# Altium PCB SmartAGR_Arduino_Version.PcbDoc
Units mil, origin at the board's own origin, x right, y up, seen from the top; angles counter-clockwise.
Board outline 6692.91 x 3937.01 mil, 2 copper layers (Top Layer, Bottom Layer); 149 components, 170 nets, 535 pads, 370 vias.
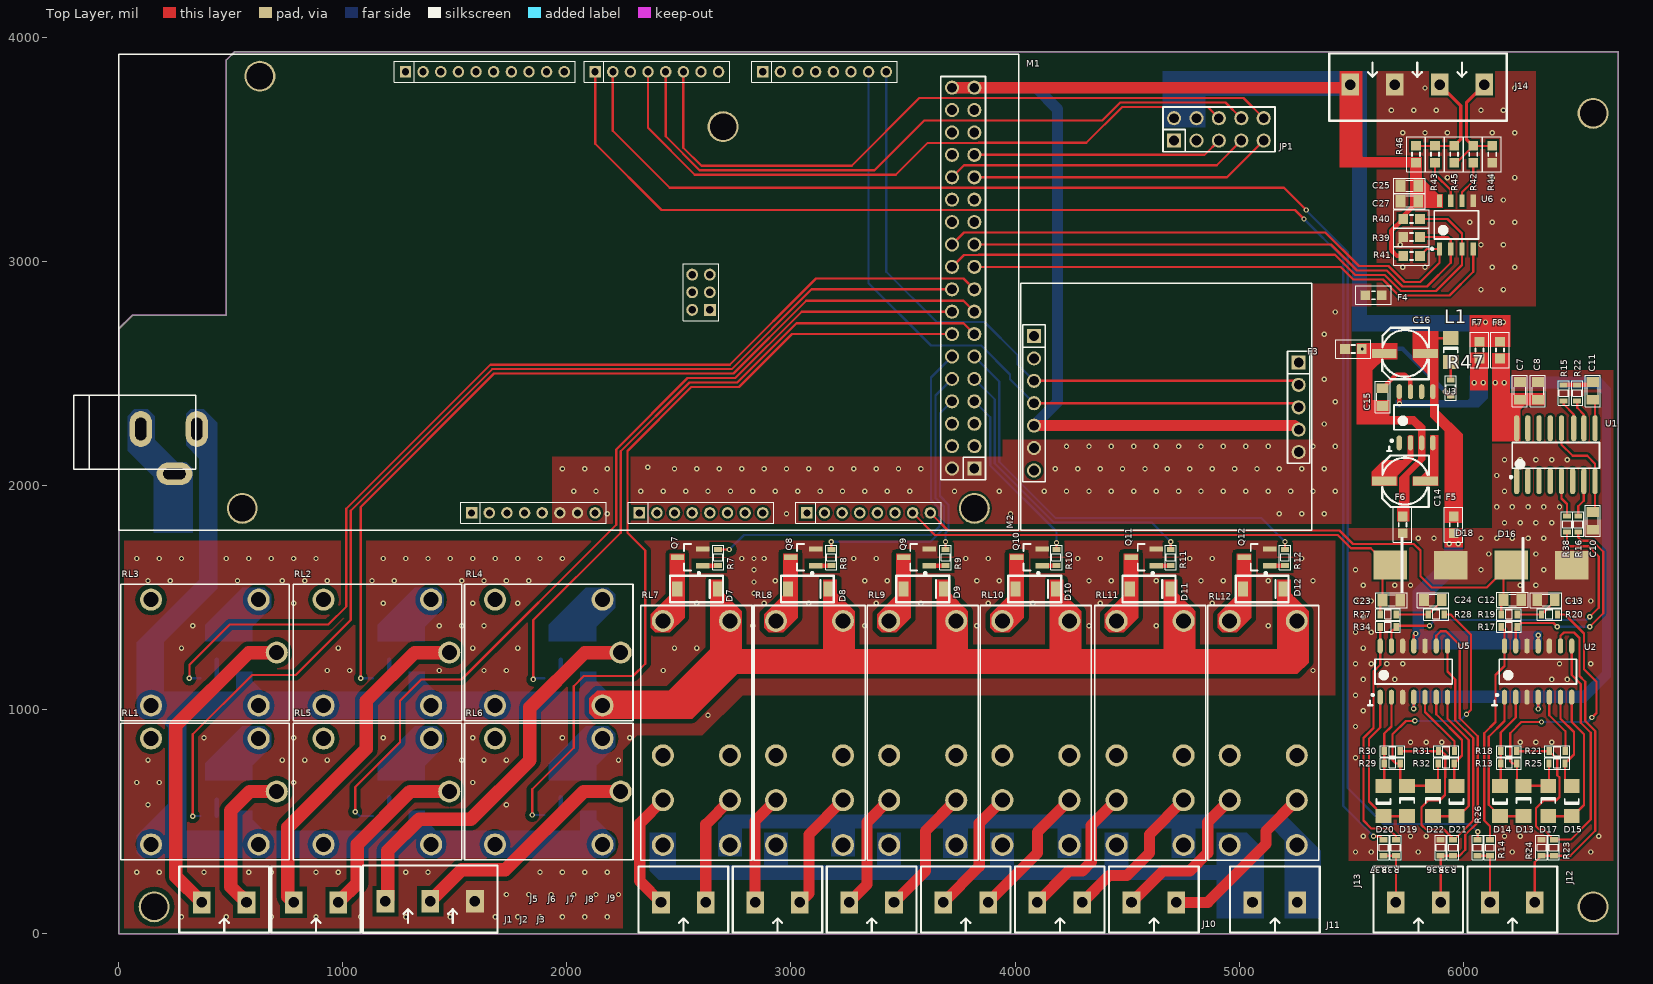
[diagram p0: Top Layer view]
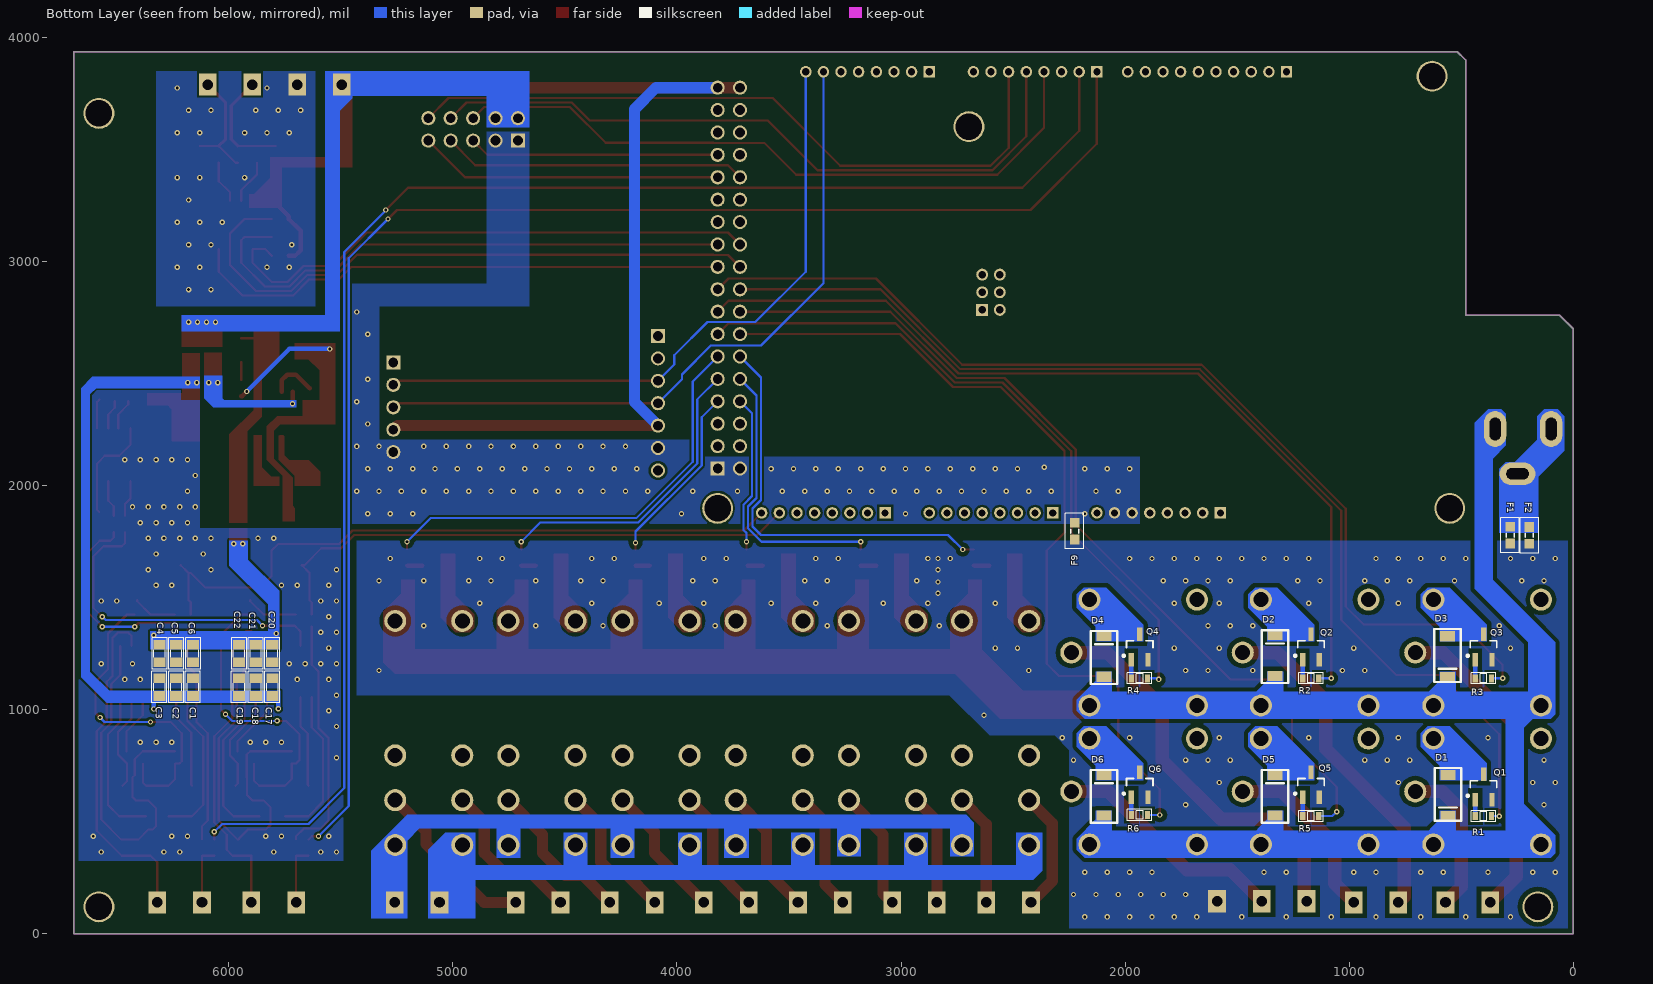
[diagram p1: Bottom Layer view, seen from below]

## Layer stack, top to bottom
Top Solder: solder mask 0.4, Solder Resist, Dk 3.5
Top Layer: signal copper 1.4
Dielectric 1: dielectric 12.6, FR-4, Dk 4.8
Bottom Layer: signal copper 1.4
Bottom Solder: solder mask 0.4, Solder Resist, Dk 3.5

## Board outline
0,0 0,2700 60,2760 480,2760 480,3900 517.01,3937.01 6692.91,3937.01 6692.91,0

## Design rules (kind name [scope] priority, off if disabled: settings)
Clearance Clearance_3 [InNamedPolygon('RGND')] p1: gap=20
Clearance Clearance_2 [InNamedPolygon('RGND')] p2: gap=20
Clearance Clearance_1 [InNamedPolygon('RGND')] p3: gap=30
Clearance [All] p4: gap=10
DiffPairsRouting [All] p1: maxlimit=10 minlimit=10 mostfreqgap=10 toplayer_minwidth=15 toplayer_maxwidth=15 toplayer_prefwidth=15 bottomlayer_minwidth=15 bottomlayer_maxwidth=15 bottomlayer_prefwidth=15 maxuncoupledlength=500
PolygonConnect PolygonConnect_12 [All vs IsNamedPolygon('AGND_TOP')] p1: connectstyle=Direct reliefconductorwidth=10 reliefentries=4 polygonreliefangle="90 Angle" airgapwidth=10
PolygonConnect PolygonConnect_11 [All vs IsNamedPolygon('AGND_BOT')] p2: connectstyle=Direct reliefconductorwidth=10 reliefentries=4 polygonreliefangle="90 Angle" airgapwidth=10
PolygonConnect PolygonConnect_10 [All vs IsNamedPolygon('DGND_BOT')] p3: connectstyle=Direct reliefconductorwidth=10 reliefentries=4 polygonreliefangle="90 Angle" airgapwidth=10
PolygonConnect PolygonConnect_9 [All vs IsNamedPolygon('DGND_TOP')] p4: connectstyle=Direct reliefconductorwidth=10 reliefentries=4 polygonreliefangle="90 Angle" airgapwidth=10
PolygonConnect PolygonConnect_8 [All vs IsNamedPolygon('DGND_BOT')] p5: connectstyle=Direct reliefconductorwidth=10 reliefentries=4 polygonreliefangle="90 Angle" airgapwidth=10
PolygonConnect PolygonConnect_7 [All vs IsNamedPolygon('RS485_GND_BOT')] p6: connectstyle=Direct reliefconductorwidth=10 reliefentries=4 polygonreliefangle="90 Angle" airgapwidth=10
PolygonConnect PolygonConnect_6 [All vs IsNamedPolygon('RS485_GND_TOP')] p7: connectstyle=Direct reliefconductorwidth=10 reliefentries=4 polygonreliefangle="90 Angle" airgapwidth=10
PolygonConnect PolygonConnect_5 [All vs IsNamedPolygon('RS485_GND_BOT')] p8: connectstyle=Direct reliefconductorwidth=10 reliefentries=4 polygonreliefangle="90 Angle" airgapwidth=10
PolygonConnect PolygonConnect_4 [All vs IsNamedPolygon('AGND_BOT')] p9: connectstyle=Direct reliefconductorwidth=10 reliefentries=4 polygonreliefangle="90 Angle" airgapwidth=10
PolygonConnect PolygonConnect_3 [All vs IsNamedPolygon('AGND_BOT')] p10: connectstyle=Direct reliefconductorwidth=10 reliefentries=4 polygonreliefangle="90 Angle" airgapwidth=10
PolygonConnect PolygonConnect_2 [All vs IsNamedPolygon('AGND_BOT')] p11: connectstyle=Direct reliefconductorwidth=10 reliefentries=4 polygonreliefangle="90 Angle" airgapwidth=10
PolygonConnect PolygonConnect_1 [All vs IsNamedPolygon('RGND')] p12: connectstyle=Direct reliefconductorwidth=10 reliefentries=4 polygonreliefangle="90 Angle" airgapwidth=10
PolygonConnect [All] p13: connectstyle=Relief reliefconductorwidth=10 reliefentries=4 polygonreliefangle="90 Angle" airgapwidth=10
RoutingVias [All] p1: holewidth=12 width=24 viastyle="Through Hole" minholewidth=10 minwidth=4 maxholewidth=50 maxwidth=100
SolderMaskExpansion [All] p1: expansion=4
Width [All] p1: maxlimit=100 minlimit=10 preferedwidth=10
29 further rules are at their usual default settings.

## Classes and differential pairs
component class RS485: C25 C27 J14 R39 R40 R41 R42 R43 R44 R45 R46 U6
component class Arduino_Mega2560: F1 F2 F3 F4 F9 JP1 M1 M2
component class Relay12VDC: D1 D2 D3 D4 D5 D6 J1 J2 J3 Q1 Q2 Q3 Q4 Q5 Q6 R1 R2 R3 R4 R5 R6 RL1 RL2 RL3 RL4 RL5 RL6
component class Relay220VAC: D7 D8 D9 D10 D11 D12 J5 J6 J7 J8 J9 J10 J11 Q7 Q8 Q9 Q10 Q11 Q12 R7 R8 R9 R10 R11 R12 RL7 RL8 RL9 RL10 RL11 RL12
component class "TDS sensor 1": C1 C2 C3 C4 C5 C6 C7 C8 C10 C11 C12 C13 C14 C15 C16 C17 C18 C19 C20 C21 C22 C23 C24 D13 D14 D15 D16 D17 D18 D19 D20 D21 D22 F5 F6 F7 F8 J12 J13 L1 R13 R14 R15 R16 R17 R18 R19 R20 R21 R22 R23 R24 R25 R26 R27 R28 R29 R30 R31 R32 R33 R34 R35 R36 R37 R38 R47 U1 U2 U3 U5
differential pair DATA: +DATA_P -DATA_N

## Components (designator, comment, footprint, x,y, rotation, side; value= is the part's Value field where it differs from the comment)
C1 "100n Cer" CN-SMD-0805 6160.01,1100.64 r270 bottom
C2 "1n Cer" CN-SMD-0805 6235.01,1100.64 r270 bottom
C3 "10n Cer" CN-SMD-0805 6310.01,1100.64 r270 bottom
C4 "100n Cer" CN-SMD-0805 6310.01,1250.64 r90 bottom
C5 "1n Cer" CN-SMD-0805 6235.01,1250.64 r90 bottom
C6 "10n Cer" CN-SMD-0805 6160.01,1250.64 r90 bottom
C7 "10n Cer" CN-SMD-0805 6254,2423 r270 top
C8 "100n Cer" CN-SMD-0805 6334,2423 r270 top
C10 "100n Cer" CN-SMD-0805 6579,1843 r90 top
C11 "1n Cer" CN-SMD-0805 6579,2423 r90 top
C12 "10u Cer" CN-SMD-0805 6220,1490 r180 top
C13 "10u Cer" CN-SMD-0805 6370,1490 r0 top
C14 "CAP ALUM 100UF 25V 20% SMDL" CAPALU_SM_5.3x5.3 5740,2020 r180 top
C15 "100n Cer" CN-SMD-0805 5640,2395 r90 top
C16 "CAP ALUM 100UF 25V 20% SMDL" CAPALU_SM_5.3x5.3 5740,2590 r180 top
C17 "100n Cer" CN-SMD-0805 5805,1100.64 r270 bottom
C18 "1n Cer" CN-SMD-0805 5880,1100.64 r270 bottom
C19 "10n Cer" CN-SMD-0805 5955,1100.64 r270 bottom
C20 "100n Cer" CN-SMD-0805 5806,1250.64 r90 bottom
C21 "1n Cer" CN-SMD-0805 5880,1250.64 r90 bottom
C22 "10n Cer" CN-SMD-0805 5955,1250.64 r90 bottom
C23 "10u Cer" CN-SMD-0805 5680,1489 r180 top
C24 "10u Cer" CN-SMD-0805 5865,1490 r0 top
C25 "100n Cer" CN-SMD-0805 5760,3339 r0 top
C27 "10n Cer" CN-SMD-0805 5760,3269 r0 top
D1 "M7 SMD" "Diode 1N4007 SMD" 618.11,740 r270 bottom
D2 "M7 SMD" "Diode 1N4007 SMD" 1271.89,1118.78 r90 bottom
D3 "M7 SMD" "Diode 1N4007 SMD" 620,1360 r270 bottom
D4 "M7 SMD" "Diode 1N4007 SMD" 2035,1115 r90 bottom
D5 "M7 SMD" "Diode 1N4007 SMD" 1271.89,495 r90 bottom
D6 "M7 SMD" "Diode 1N4007 SMD" 2035,495 r90 bottom
D7 "M7 SMD" "Diode 1N4007 SMD" 2460,1480 r0 top
D8 "M7 SMD" "Diode 1N4007 SMD" 2955,1480 r0 top
D9 "M7 SMD" "Diode 1N4007 SMD" 3470,1480 r0 top
D10 "M7 SMD" "Diode 1N4007 SMD" 3970,1480 r0 top
D11 "M7 SMD" "Diode 1N4007 SMD" 4480,1480 r0 top
D12 "M7 SMD" "Diode 1N4007 SMD" 4985,1480 r0 top
D13 "Diode 4148" CD3216-1206 6270,595 r90 top
D14 "Diode 4148" CD3216-1206 6165,590 r270 top
D15 "Diode 4148" CD3216-1206 6485,590 r270 top
D16 "Diode_SS34" DO-214AB_MOD_EXT 6350,1645 r0 top
D17 "Diode 4148" CD3216-1206 6380,595 r90 top
D18 "Diode_SS34" DO-214AB_MOD_EXT 5810,1645 r0 top
D19 "Diode 4148" CD3216-1206 5750,595 r90 top
D20 "Diode 4148" CD3216-1206 5645,590 r270 top
D21 "Diode 4148" CD3216-1206 5970,590 r270 top
D22 "Diode 4148" CD3216-1206 5865,595 r90 top
F1 "FBFB0805" RESC_0603 281,1779 r270 bottom
F2 "FBFB0805" RESC_0603 196,1778 r270 bottom
F3 "FBFB0805" RESC_0603 5510,2610 r0 top
F4 "FBFB0805" RESC_0603 5600,2850 r0 top
F5 "FBFB0805" RESC_0603 5958,1825 r270 top
F6 "FBFB0805" RESC_0603 5730,1825 r90 top
F7 "FBFB0805" RESC_0603 6073,2605 r270 top
F8 "FBFB0805" RESC_0603 6165,2605 r270 top
F9 "FBFB0805" RESC_0603 2225,1797 r270 bottom
J1 "MediumHeader_2" "Medium - Header 2" 470,140 r180 top
J2 "MediumHeader_2" "Medium - Header 2" 880,140 r180 top
J3 "MediumHeader_3" "Medium - Header 3" 1190,145 r0 top
J5 "MediumHeader_2" "Medium - Header 2" 2520,140 r180 top
J6 "MediumHeader_2" "Medium - Header 2" 2940,140 r180 top
J7 "MediumHeader_2" "Medium - Header 2" 3360,140 r180 top
J8 "MediumHeader_2" "Medium - Header 2" 3780,140 r180 top
J9 "MediumHeader_2" "Medium - Header 2" 4200,140 r180 top
J10 "MediumHeader_2" "Medium - Header 2" 4620,140 r180 top
J11 "MediumHeader_2" "Medium - Header 2" 5160,140 r180 top
J12 "MediumHeader_2" "Medium - Header 2" 6220,140 r180 top
J13 "MediumHeader_2" "Medium - Header 2" 5800,140 r180 top
J14 "MediumHeader_4" "Medium - Header 4" 6095,3790 r180 top
JP1 "JP5x2" JP5-D2T 4910,3590 r0 top
L1 "LTST-C171KRKT" LED_0805 5945,2605 r90 top
M1 "MEGA 2560 Board" "MEGA 2560" 0,1800 r0 top
M2 "RTC MODULE" "MODULE RTC DS1307-AT24C" 5325,2904 r180 top
Q1 "MMBT3904" SOT23_L_MOD 400,655 r90 bottom
Q2 "MMBT3904" SOT23_L_MOD 1170,1280 r90 bottom
Q3 "MMBT3904" SOT23_L_MOD 400,1280 r90 bottom
Q4 "MMBT3904" SOT23_L_MOD 1935,1280 r90 bottom
Q5 "MMBT3904" SOT23_L_MOD 1170,665 r90 bottom
Q6 "MMBT3904" SOT23_L_MOD 1935,665 r90 bottom
Q7 "MMBT3904" SOT23_L_MOD 2550,1680 r180 top
Q8 "MMBT3904" SOT23_L_MOD 3055,1680 r180 top
Q9 "MMBT3904" SOT23_L_MOD 3560,1680 r180 top
Q10 "MMBT3904" SOT23_L_MOD 4065,1680 r180 top
Q11 "MMBT3904" SOT23_L_MOD 4575,1680 r180 top
Q12 "MMBT3904" SOT23_L_MOD 5080,1680 r180 top
R1 "R_1K_0603" RES-SMD-0603 400,525 r0 bottom
R2 "R_1K_0603" RES-SMD-0603 1170,1140 r0 bottom
R3 "R_1K_0603" RES-SMD-0603 400,1140 r0 bottom
R4 "R_1K_0603" RES-SMD-0603 1935,1140 r0 bottom
R5 "R_1K_0603" RES-SMD-0603 1170,525 r0 bottom
R6 "R_1K_0603" RES-SMD-0603 1935,530 r0 bottom
R7 "R_1K_0603" RES-SMD-0603 2675,1680 r270 top
R8 "R_1K_0603" RES-SMD-0603 3180,1680 r270 top
R9 "R_1K_0603" RES-SMD-0603 3690,1680 r270 top
R10 "R_1K_0603" RES-SMD-0603 4185,1680 r270 top
R11 "R_1K_0603" RES-SMD-0603 4695,1680 r270 top
R12 "R_1K_0603" RES-SMD-0603 5205,1680 r270 top
R13 "R_10K_0603" RES-SMD-0603 6205,760 r180 top
R14 "R_0R_0603" RES-SMD-0603 6120,385 r270 top
R15 "R_100K_0603" RES-SMD-0603 6449,2413 r90 top
R16 "R_100K_0603" RES-SMD-0603 6514,1828 r90 top
R17 "R_4K99_0603" RES-SMD-0603 6205,1370 r0 top
R18 "R_10K_0603" RES-SMD-0603 6205,815 r180 top
R19 "R_10K_0603" RES-SMD-0603 6205,1425 r0 top
R20 "R_10K_0603" RES-SMD-0603 6385,1425 r0 top
R21 "R_10K_0603" RES-SMD-0603 6420,815 r0 top
R22 "R_10K_0603" RES-SMD-0603 6509,2413 r90 top
R23 "R_4K99_0603" RES-SMD-0603 6405,385 r270 top
R24 "R_1M_0603" RES-SMD-0603 6350,385 r270 top
R25 "R_10K_0603" RES-SMD-0603 6420,760 r180 top
R26 "R_0R_0603" RES-SMD-0603 6065,385 r270 top
R27 "R_10K_0603" RES-SMD-0603 5665,1425 r0 top
R28 "R_10K_0603" RES-SMD-0603 5880,1425 r0 top
R29 "R_10K_0603" RES-SMD-0603 5685,760 r180 top
R30 "R_10K_0603" RES-SMD-0603 5685,815 r180 top
R31 "R_10K_0603" RES-SMD-0603 5925,815 r0 top
R32 "R_10K_0603" RES-SMD-0603 5925,760 r180 top
R33 "R_0R_0603" RES-SMD-0603 5700,385 r270 top
R34 "R_4K99_0603" RES-SMD-0603 5665,1370 r0 top
R35 "R_4K99_0603" RES-SMD-0603 5955,385 r270 top
R36 "R_1M_0603" RES-SMD-0603 5900,385 r270 top
R37 "R_0R_0603" RES-SMD-0603 5645,385 r270 top
R38 "R_100K_0603" RES-SMD-0603 6464,1828 r90 top
R39 "R_10K_0603" RESC_0603 5770,3110 r180 top
R40 "R_10K_0603" RESC_0603 5770,3190 r180 top
R41 "R_4K99_0603" RESC_0603 5770,3025 r180 top
R42 "R_10K_0603" RESC_0603 6045,3479 r90 top
R43 "R_10R_0603" RESC_0603 5875,3479 r90 top
R44 "R_2K_0603" RESC_0603 6130,3479 r270 top
R45 "R_100R_0603" RESC_0603 5960,3479 r270 top
R46 "R_2K_0603" RESC_0603 5790,3479 r90 top
R47 "R_560R_0603" RES-SMD-0603 5945,2435 r90 top
RL1 "SRD-12VDC-SL-C" "RELAY SRD-12VDC" 760,940 r180 top
RL2 "SRD-12VDC-SL-C" "RELAY SRD-12VDC" 1530,1560 r180 top
RL3 "SRD-12VDC-SL-C" "RELAY SRD-12VDC" 760,1560 r180 top
RL4 "SRD-12VDC-SL-C" "RELAY SRD-12VDC" 2295,1560 r180 top
RL5 "SRD-12VDC-SL-C" "RELAY SRD-12VDC" 1530,940 r180 top
RL6 "SRD-12VDC-SL-C" "RELAY SRD-12VDC" 2295,940 r180 top
RL7 "SMI-12VDC" "RELAY SMI-2P" 2330,1465 r270 top
RL8 "SMI-12VDC" "RELAY SMI-2P" 2835,1465 r270 top
RL9 "SMI-12VDC" "RELAY SMI-2P" 3340,1465 r270 top
RL10 "SMI-12VDC" "RELAY SMI-2P" 3845,1465 r270 top
RL11 "SMI-12VDC" "RELAY SMI-2P" 4355,1465 r270 top
RL12 "SMI-12VDC" "RELAY SMI-2P" 4860,1465 r270 top
U1 "CD4060BM96" SOIC_16 6414,2138 r90 top
U2 "LMV324AM14X" SOIC-14 6260,1170 r90 top
U3 "ICL7660ACBAZA-T" SOIC-8_MOD_24LC128 5790,2305 r90 top
U5 "LMV324AM14X" SOIC-14 5705,1170 r90 top
U6 "SP485" SOP8 5970,3164 r90 top

## Footprints (in the part's own frame and the unit in brackets; to place one, negate y for a bottom-side part, rotate by r counter-clockwise, add the part's x,y. Pads: shape width x height; smd on the part's side, far side on the other; paste and mask are expansions set on the pad)
CAPALU_SM_5.3x5.3 [mm] "5.3mmx5.3mm"
  rect 2.8x1 smd: 1(2.335,0) 2(-2.335,0)
  silkscreen extent -2.74,-2.92 2.57,2.92
CD3216-1206 [mm] "Chip Diode; Body 3.2 x 1.6 mm (LxW typ)"
  rect 1.6x1.8 smd: 1(-1.781,0) 2(1.654,0)
  silkscreen extent -0.3,-0.8 0.3,0.8
CN-SMD-0805 [mil]
  rect 43.31x55 smd: 1(-39.36,0.01) 2(39.37,0.01)
  silkscreen extent -70,-34 70,33, body extent -39,-25 39,25, height 31
"Diode 1N4007 SMD" [mm]
  rect 1.15x1.727 smd: 1(0.818,1.5) 2(5.432,1.5)
  silkscreen extent 0,0 6,3
DO-214AB_MOD_EXT [mm] "SS34-Schottky"
  rect 3.81x3.3 smd: 1(-3.422,0)
  rect 3.81x3.2 smd: 2(3.422,0)
  silkscreen extent -2.16,-3.05 -2.03,3.05, body extent -3.3,-2.8 3.3,2.8, height 1.02
JP5-D2T [mm] "10 pins, dual pin, straight, gold plating"
  rect 1.6x1.6 hole 1.1: 1(-5.08,-1.27)
  round 1.6 hole 1.1: 2(-2.54,-1.27) 3(0,-1.27) 4(2.54,-1.27) 5(5.08,-1.27) 6(5.08,1.27) 7(2.54,1.27) 8(0,1.27) 9(-2.54,1.27) 10(-5.08,1.27)
  silkscreen extent -6.35,-2.54 6.35,2.54, body extent -6.35,-2.54 6.35,2.54, height 8.55
LED_0805 [mm] "Chip Diode; Body 3.2 x 1.6 mm (LxW typ)"
  rect 1.6x1.8 smd: 1(-1.349,0) 2(1.349,0)
  silkscreen extent -0.3,-0.8 0.3,0.8
"Medium - Header 2" [mm]
  rect 2x2.5 hole 1.2: 1(-2.54,0) 2(2.54,0)
  silkscreen extent -5.08,-4.08 5.08,3.43, body extent -5,-4.07 5,3.43, height 10
"Medium - Header 3" [mm]
  rect 2x2.5 hole 1.2: 1(0,0) 2(5.08,0) 3(10.147,0)
  silkscreen extent -2.54,-3.58 12.7,4.06, body extent -2.42,-3.51 12.58,3.99, height 10
"Medium - Header 4" [mm]
  rect 2x2.5 hole 1.2: 1(0,0) 2(5.08,0) 3(10.147,0) 4(15.215,0)
  silkscreen extent -2.54,-3.53 17.58,4.09, body extent -2.43,-3.46 17.57,4.04, height 10
"MEGA 2560" [mm]
  round 1.3 hole 0.8: 0(68,52) 1(66,52) 2(64,52) 3(62,52) 3V1(46,2) 4(60,52) 5(58,52) 5V3(42,2) 5V4(48,2) 6(56,52) 8(50.5,52) 9(48.5,52) 10(46.5,52) 11(44.5,52) 12(42.5,52) 13(40.5,52) 15(75,52) 16(77,52) 17(79,52) 18(81,52) 19(83,52) 20(85,52) 21(87,52) A1(61,2) A2(63,2) A3(65,2) A4(67,2) A5(69,2) A6(71,2) A7(73,2) A9(80,2) A10(82,2) A11(84,2) A12(86,2) A13(88,2) A14(90,2) A15(92,2) AREF(36.5,52) G3(50,2) G4(52,2) G5(38.5,52) RST(44,2) SDA(34.5,52) VIN(54,2)
  round 1.6 hole 1.1: 5V1(94.453,50.199) 5V2(96.993,50.199) 22(94.453,47.659) 23(96.993,47.659) 24(94.453,45.119) 25(96.993,45.119) 26(94.453,42.579) 27(96.993,42.579) 28(94.453,40.039) 29(96.993,40.039) 30(94.453,37.499) 31(96.993,37.499) 32(94.453,34.959) 33(96.993,34.959) 34(94.453,32.419) 35(96.993,32.419) 36(94.453,29.879) 37(96.993,29.879) 38(94.453,27.339) 39(96.993,27.339) 40(94.453,24.799) 41(96.993,24.799) 42(94.453,22.259) 43(96.993,22.259) 44(94.453,19.719) 45(96.993,19.719) 46(94.453,17.179) 47(96.993,17.179) 48(94.453,14.639) 49(96.993,14.639) 50(94.453,12.099) 51(96.993,12.099) 52(94.453,9.559) 53(96.993,9.559) G1(94.453,7.019)
  rect 1.3x1.3 hole 0.8: 7(54,52) 14(73,52) A0(59,2) A8(78,2) NC(40,2) SCL(32.5,52)
  rect 1.6x1.6 hole 1.1: G2(96.993,7.019)
  oval 2.54x4.064 hole 1.27 slot 2.54 at 90 deg: P_In(8.85,11.5) PGND1(2.5,11.5)
  oval 4.064x2.54 hole 1.27 slot 2.54 at 0 deg: PGND2(6.31,6.42)
  round 3.5 hole 3: ""(14,2.5) ""(16,51.5) ""(68.5,45.78) ""(97,2.5)
  round 1.35 hole 0.85: ""(65,25) ""(65,27) ""(65,29) ""(67,27) ""(67,29)
  rect 1.35x1.35 hole 0.85: ""(67,25)
  silkscreen extent -5.12,0 102,54, body extent -5.25,0 102.11,54.1, height 11.02
"MODULE RTC DS1307-AT24C" [mm]
  rect 1.6x1.6 hole 1.1: 1(1.5,9) 6(31.5,6)
  round 1.6 hole 1.1: 2(1.5,11.54) 3(1.5,14.08) 4(1.5,16.62) 5(1.5,19.16) 7(31.5,8.54) 8(31.5,11.08) 9(31.5,13.62) 10(31.5,16.16) 11(31.5,18.7) 12(31.5,21.24)
  silkscreen extent 0,0 33,28, body extent 0,0 33,28, height 8.54
"RELAY SMI-2P" [mm]
  round 2.5 hole 1.7: 1(16.99,10.1) 2(22.07,10.1) 3(27.15,10.1) 4(16.99,2.5) 5(22.07,2.5) 6(27.15,2.5) 7(1.75,10.1) 8(1.75,2.5)
  silkscreen extent 0,0 28.9,12.6, body extent 0,0 29,12.5, height 20.6
"RELAY SRD-12VDC" [mm]
  round 2.5 hole 1.7: 1(1.4,7.75) 2(15.65,1.75) 3(15.65,13.75) 4(3.45,13.75) 5(3.45,1.75)
  silkscreen extent 0,0 19.1,15.5, body extent 0,0 19.05,15.49, height 15.3
RES-SMD-0603 [mm]
  rect 0.6x0.9 smd: 1(-0.889,0) 2(0.927,0)
  silkscreen extent -1.4,-0.64 1.4,0.64, body extent -0.8,-0.4 0.8,0.4, height 0.43
RESC_0603 [mm] "Chip Resistor, Body 1.6x0.8mm, IPC Low Density"
  rect 1.1x1.1 smd: 1(-0.95,0) 2(0.95,0)
  silkscreen extent -2,-1.05 2,1.05, body extent -0.85,-0.48 0.85,0.48, height 0.6
SOIC-8_MOD_24LC128 [mm] "SOIC, 8-Leads, Body 4.90x3.85mm, Pitch 1.27mm, IPC Medium Density"
  oval 1.7x0.6 smd: 1(-2.904,1.905) 2(-2.904,0.635) 3(-2.904,-0.635) 4(-2.904,-1.905) 5(2.904,-1.905) 6(2.904,-0.635) 7(2.904,0.635) 8(2.904,1.905)
  silkscreen extent -3.81,-2.5 1.4,3.3, body extent -2,-2.5 2,2.5, height 1.75
SOIC-14 [mm] "SOIC, 8-Leads, Body 4.90x3.85mm, Pitch 1.27mm, IPC Medium Density"
  oval 1.7x0.6 smd: 1(-2.904,1.905) 2(-2.904,0.635) 3(-2.904,-0.635) 4(-2.904,-1.905) 5(-2.904,-3.175) 6(-2.904,-4.445) 7(-2.905,-5.715) 8(2.904,-5.715) 9(2.904,-4.445) 10(2.904,-3.175) 11(2.904,-1.905) 12(2.904,-0.635) 13(2.904,0.635) 14(2.904,1.905)
  silkscreen extent -3.81,-6.25 1.4,3.3, body extent -2,-6.22 2,2.5, height 1.75
SOIC_16 [mm]
  oval 2.95x0.6 smd: 1(-3,4.445) 2(-3,3.175) 3(-3,1.905) 4(-3,0.635) 5(-3,-0.635) 6(-3,-1.905) 7(-3,-3.175) 8(-3,-4.445) 9(3,-4.445) 10(3,-3.175) 11(3,-2.032) 12(3,-0.635) 13(3,0.635) 14(3,1.905) 15(3,3.175) 16(3,4.445)
  silkscreen extent -2.66,-4.95 1.4,5.2, body extent -2,-5 2,5, height 1.75
SOP8 [mm] "SOP8, 8-Leads, Body 4,90x3,90mm, Pitch 1,27mm, IPC Medium Density"
  rect 1.45x0.6 smd: 1(-2.725,1.905) 2(-2.725,0.635) 3(-2.725,-0.635) 4(-2.725,-1.905) 5(2.725,-1.905) 6(2.725,-0.635) 7(2.725,0.635) 8(2.725,1.905)
  silkscreen extent -2.85,-2.5 1.6,2.88, body extent -2,-2.5 2,2.5, height 1.5
SOT23_L_MOD [mil] "SOT23, 3-Leads, Body 2.9x1.3mm, Pitch 0.95mm, Lead Span 2.3mm, IPC High Density"
  rect 60x24 smd: 1(-56.37,37.4) 2(-56.37,-37.4) 3(56.37,0)
  silkscreen extent -44,-59 28,76, body extent -28,-59 28,59, height 43

## Part data
C1 C4 C8 C10 C15 C17 C20 C25: library part CAPC0805_104, "CAP CER 0.1UF 25V 10% X7R 0805"
C2 C5 C11 C18 C21: library part CAPC0805_102, "CAP CER 1000PF 50V 10% X7R 0805"
C3 C6 C7 C19 C22 C27: library part CAPC0805_103, "CAP CER 10000PF 100V X7R 0805"
C12 C13 C23 C24: library part CAPC0805_106, "CAP CER 10UF 6.3V 10% X7R 0805"
C14 C16: library part CAPALU100U25V, "CAP ALUM 100UF 25V 20% SMD"
D1 D2 D3 D4 D5 D6 D7 D8 D9 D10 D11 D12: library part Diode_1N4007, "DIODE GEN PURP 1KV 1A DO214AC"
D13 D14 D15 D17 D19 D20 D21 D22: library part Diode_4148, "DIODE SWITCHING 75V 0.2A LLDS"
D16 D18: "DIODE SCHOTTKY 40V 3A SMC"
F1 F2 F3 F4 F5 F6 F7 F8 F9: library part FB0603_1000Ohm, "FERRITE BEAD 1000 OHM 0603"
JP1: "WR-PHD 2.54 mm Dual Socket Header"
L1: library part LED0805_RED, "LED RED CLEAR 0805 SMD"
M1: "Arduino ATMEGA 2560"
M2: library part "RTC DS1307-AR24C", "RTC DS1307-AT24C"
Q1 Q2 Q3 Q4 Q5 Q6 Q7 Q8 Q9 Q10 Q11 Q12: "TRANSISTOR GP NPN AMP SOT-23"
R1 R2 R3 R4 R5 R6 R7 R8 R9 R10 R11 R12: library part RES0603_1K, "RES 1K OHM 1/10W 1% 0603 SMD"
R13 R18 R19 R20 R21 R22 R25 R27 R28 R29 R30 R31 R32 R39 R40 R42: library part RES0603_10K, "RES 10.0K OHM 1/10W 1% 0603 SMD"
R14 R26 R33 R37: library part RES0603_0R, "RES 0.0 OHM 1/10W JUMP 0603 SMD"
R15 R16 R38: library part RES0603_100K, "RES 100K OHM 1/10W 1% 0603 SMD"
R17 R23 R34 R35 R41: library part RES0603_4K99, "RES 4.99K OHM 1/10W 1% 0603 SMD"
R24 R36: library part RES0603_1M, "RES 1M OHM 1/8W 1% 0603 SMD"
R43: library part RES0603_10R, "RES 10.0 OHM 1/10W 0603 SMD"
R44 R46: library part RES0603_2K, "RES 2K OHM 1/10W 0603 SMD"
R45: library part RES0603_100R, "RES 100 OHM 1/10W 5% 0603 SMD"
R47: library part RES0603_560R, "RES 560 OHM 1/10W 0603 SMD"
RL1 RL2 RL3 RL4 RL5 RL6: library part "RELAY SRD-12VDC", "Relay SPDT,10A - 12VDC 5 Pin"
RL7 RL8 RL9 RL10 RL11 RL12: library part "RELAY SMI-2P", "Relay 12VDC, 2 channel"
U1: library part CD4060BM, "IC BINARY COUNTER/DIV/OSC 16SOIC"
U2 U5: library part LMV324A, "IC OPAMP VFB 1.4MHZ RRO 14SOIC"
U3: library part ICL7660, "IC REG SWTCHD CAP INV 45MA 8SOIC"
U6: "IC TXRX RS485 HALF DUPLEX 8SOIC"

## Free pads (board coordinates)
  round 137.8 hole 118.11: ""(157.48,120) ""(6580,120) ""(6580,3661.42)

## Via types
v1: diameter 24, hole 12, Top Layer to Bottom Layer, 370 vias

## Nets (pads, with @x,y where several pads share a name; then routed paths per layer and width w, separated by ;. In a path a pad name is that pad's centre, name@x,y a point inside that pad or via, vN(x,y) a via of type N, cw(c..) or ccw(c..) an arc to the next point about the centre after c; other vN are vias at no path point)
3V3: M1.3V1
5VDC: C25.2 C27.2 F7.1 F8.1 J14.4 JP1.9 JP1.10 M1.5V1 M1.5V2 M2.4 M2.10 R40.2 R41.2 R46.1 U6.8 | length 5164
  Top Layer w20: R41.2 5705,3025 5680,3050 5680,3137.4 R40.2 5732.6,3202.23 C27.2 C27.2@5790,3278.38
  Top Layer w50: M1.5V1 M1.5V2 J14.4@5482.34,3776.34 ; M2.10 5247.83,2267.78 M2.4
  Bottom Layer w50: M1.5V2 4093.66,3776.34 4190,3680 4190,2372.94 M2.10
  other v1: 6060,2730 6100,2730 6140,2730 6180,2730
5VDC_3: M1.5V3
5VDC_4: M1.5V4
12VDC: D1.2 D2.1 D3.2 D4.1 D5.1 D6.1 D7.2 D8.2 D9.2 D10.2 D11.2 D12.2 M1.P_In RL1.3 RL1.4 RL2.3 RL2.4 RL3.3 RL3.4 RL4.3 RL4.4 RL5.3 RL5.4 RL6.3 RL6.4 RL7.7 RL8.7 RL9.7 RL10.7 RL11.7 RL12.7
+5VDC: F7.2 U3.8 | length 55.7
  Top Layer w20: U3.8 5715,2367 5714,2366 v1(5716,2366)
  other v1: 6050,2460 6090,2460
+VS: C1.2 C2.2 C3.2 C7.2 C8.2 C17.2 C18.2 C19.2 F8.2 U1.16 U2.4 U5.4 | length 241.4
  Top Layer w10: v1(5779,1004) 5780,1005 U5.4 ; v1(6335,1003) U2.4
  Bottom Layer w10: 5779,1035.27 C17.2 ; C3.2 6335,1036.26
  Bottom Layer w20: v1(5779,1004) 5779,1035.27 ; v1(6335,1003) 6335,1036.26
  other v1: 6144,2460 6183,2460
-5VDC: C16.2 F5.1 L1.2 U3.5 | length 166.6
  Top Layer w10: C16.2 5831.93,2633.17 5856.88,2658.12 L1.2
-VS: C4.2 C5.2 C6.2 C20.2 C21.2 C22.2 F5.2 U2.11 U5.11 | length 110
  Top Layer w10: U5.11 5780,1336 5784,1340 v1(5789,1340) ; U2.11 v1(6335,1332)
  other v1: 5938,1740 5978,1740
A0: M1.A0
A1: M1.A1
A2: M1.A2
A3: M1.A3
A4: M1.A4
A5: M1.A5
A6: M1.A6
A7: M1.A7
A8: M1.A8
A9: M1.A9
A10: M1.A10
A11: M1.A11
A12: M1.A12
A13: M1.A13
A14: C23.2 D18.1 M1.A14 R27.1 | length 2467.5
  Top Layer w10: M1.A14 3642.05,1780 5440,1780 5500,1720 5588,1720 5663,1645 D18.1 5640.63,1610.36 C23.2 5630,1478.36 R27.1
A15: C12.2 D16.1 M1.A15 R19.1 | length 3030
  Top Layer w10: M1.A15 3700.79,1800 5448.28,1800 5508.28,1740 5780,1740 5810,1710 5810,1595 5860,1545 6105,1545 6170.36,1610.36 D16.1@6180.63,1610.36 ; R19.1 6170,1479.36 C12.2 D16.1@6180.63,1610.36 ; D16.1 D16.1@6180.63,1610.36
AGND: C1.1 C2.1 C3.1 C4.1 C5.1 C6.1 C7.1 C8.1 C10.1 C12.1 C13.1 C17.1 C18.1 C19.1 C20.1 C21.1 C22.1 C23.1 C24.1 D16.2 D18.2 F6.1 R24.1 R36.1 U2.3 U2.10 U2.12 U5.3 U5.10 U5.12
  other v1: 5520,365 5590,365 5800,365 6220,365 6290,365 6570,365 5555,435 5765,435 5835,435 6185,435 6255,435 6605,435 5520,785 5765,855 5835,855 5905,855 6255,855 6325,855 6395,855 5520,925 5555,995 5520,1065 5555,1135 5695,1135 6395,1135 6465,1135 5520,1205 5590,1205 5660,1205 5730,1205 6430,1205 6570,1205 5555,1275 5520,1345 5590,1345 5555,1415 5520,1485 5590,1485 6500,1485 6570,1485 5555,1555 5695,1555 5765,1555 6255,1555 6325,1555 5520,1625 6080,1625 6360,1625 6115,1695 6325,1695 5800,1765 5870,1765 6080,1765 6150,1765 6220,1765 6290,1765 6360,1765 6185,1835 6255,1835 6325,1835 6395,1835 6150,1905 6220,1905 6290,1905 6360,1905 6430,1905 6185,1975 6150,2045 6185,2115 6255,2115 6325,2115 6395,2115 6465,2115
AREF: M1.AREF
DATA_N: J14.2 R43.2 R45.1 R46.2 | length 495.4
  Top Layer w10: R46.2 R43.2 R45.1
  Top Layer w15: J14.2 5990,3695 5990,3546.4 R45.1
DATA_P: J14.1 R42.2 R44.1 R45.2 | length 520.1
  Top Layer w10: R45.2 5970.2,3441.6 R42.2 R44.1
  Top Layer w15: R42.2 6015,3546.4 6015,3710 J14.1
DGND: F3.1 F4.1 F9.1 JP1.1 JP1.2 M1.G1 M1.G2 M1.G3 M1.G4 M2.5 M2.11
  other v1: 2180,1875 2980,1875 3980,1875 5180,1875 5280,1875 5380,1875 2030,1975 2130,1975 2330,1975 2430,1975 2530,1975 2630,1975 2730,1975 2830,1975 2930,1975 3030,1975 3130,1975 3230,1975 3330,1975 3430,1975 3530,1975 3730,1975 3930,1975 4130,1975 4230,1975 4330,1975 4430,1975 4530,1975 4630,1975 4730,1975 4830,1975 4930,1975 5030,1975 5130,1975 5230,1975 5330,1975 5430,1975 1980,2075 2080,2075 2180,2075 2480,2075 2580,2075 2680,2075 2780,2075 2880,2075 2980,2075 3080,2075 3180,2075 3280,2075 3380,2075 3480,2075 3580,2075 4180,2075 4280,2075 4380,2075 4480,2075 4580,2075 4680,2075 4780,2075 4880,2075 4980,2075 5080,2075 5180,2075 5280,2075 5380,2075 2361,2082 4230,2175 4330,2175 4430,2175 4530,2175 4630,2175 4730,2175 4830,2175 4930,2175 5030,2175 5130,2175 5330,2175 5430,2175 5380,2275 5430,2375 5380,2475 5380,2675 5430,2775
GND: M1.G5
MISO: M1.50
MOSI: M1.51
NetC10_2: C10.2 U1.8 U1.12 | length 478.1
  Top Layer w10: U1.12 6439,2183 6489,2133 6554,2133 6589,2098 U1.8 6589,1892.38 C10.2
NetC11_1: C11.1 U1.9 | length 131.7
  Top Layer w10: C11.1 6589,2373.63 U1.9
NetC11_2: C11.2 R15.2 R22.2 | length 135.3
  Top Layer w20: R15.2 R22.2 6566.11,2449.49 C11.2
NetC13_2: C13.2 R19.2 R20.1 | length 198.1
  Top Layer w10: R19.2 R20.1 6409.37,1484.38 C13.2
NetC14_1: C14.1 U3.2
NetC14_2: C14.2 U3.4
NetC15_2: C15.2 U3.7 | length 211.1
  Top Layer w20: C15.2 5700.62,2495 5740,2495 5765,2470 U3.7
NetC24_2: C24.2 R27.2 R28.1 | length 233.1
  Top Layer w10: R27.2 R28.1 5904.37,1484.38 C24.2
NetD1_1: D1.1 Q1.3 RL1.5
NetD2_2: D2.2 Q2.3 RL2.5
NetD3_1: D3.1 Q3.3 RL3.5
NetD4_2: D4.2 Q4.3 RL4.5
NetD5_2: D5.2 Q5.3 RL5.5
NetD6_2: D6.2 Q6.3 RL6.5
NetD7_1: D7.1 Q7.3 RL7.8
NetD8_1: D8.1 Q8.3 RL8.8
NetD9_1: D9.1 Q9.3 RL9.8
NetD10_1: D10.1 Q10.3 RL10.8
NetD11_1: D11.1 Q11.3 RL11.8
NetD12_1: D12.1 Q12.3 RL12.8
NetD13_1: D13.1 D14.2 U2.1 | length 685.9
  Top Layer w10: U2.1 6185,950 6114.57,879.57 6114.57,575.32 D14.2 D13.1
NetD13_2: D13.2 D17.2 R13.1 R20.2 R25.2 | length 1430.7
  Top Layer w10: v1(6350,945) 6260,945 6210,895 6210,770 6220,760 R13.1 6240,690.11 D13.2 6370,660.12 6383.51,673.63 R25.2 ; R20.2 6455,1425 6540,1340 6540,1180 6595,1125 6595,985 v1(6575,965)
  Bottom Layer w10: v1(6350,945) 6555,945 v1(6575,965)
NetD14_1: D14.1 R13.2 R18.2 U2.2 | length 424.5
  Top Layer w10: D14.1 6168.51,663.63 R13.2 R18.2 6168.51,898.51 6235,965 U2.2
NetD15_1: D15.1 R25.1 U2.6 | length 445.3
  Top Layer w10: U2.6 6435,960 6495,900 6495,800 R25.1 6455,680.11 D15.1@6475,660.12
NetD15_2: D15.2 D17.1 U2.7 | length 694.2
  Top Layer w10: D17.1@6370,524.88 6489.88,524.88 6540,575 6540,890 6485,945 U2.7
NetD19_1: D19.1 D20.2 U5.1 | length 683.4
  Top Layer w10: U5.1 5630,920 5580,870 5580,589.88 D20.2 D19.1
NetD19_2: D19.2 D22.2 R28.2 R29.1 R32.2 | length 1379.5
  Top Layer w10: v1(5785,950) 5745,950 5685,890 5685,775 5700,760 R29.1 5720,690.11 D19.2 D22.2 5888.51,683.63 R32.2 ; R28.2 5945,1425 6035,1335 6035,1000 v1(6015,980)
  Bottom Layer w10: v1(5785,950) 5985,950 v1(6015,980)
NetD20_1: D20.1 R29.2 R30.2 U5.2 | length 410
  Top Layer w10: D20.1 5648.51,663.63 R29.2 R30.2 5648.51,893.51 5680,925 U5.2
NetD21_1: D21.1 R32.1 U5.6 | length 461.8
  Top Layer w10: U5.6 5880,980 5995,865 5995,795 R32.1 5960,670.11 D21.1
NetD21_2: D21.2 D22.1 U5.7 | length 703.7
  Top Layer w10: D22.1 5979.88,524.88 6025,570 6025,865 5930,960 U5.7
NetF1_1: F1.1 F2.1 M1.PGND1 M1.PGND2
NetJ5_1: J5.1 RL7.2 | length 500.7
  Top Layer w50: J5.1 2620,488.46 RL7.2
NetJ5_2: J5.2 RL7.5 | length 538.3
  Top Layer w50: J5.2 2325,235 2325,492.68 RL7.5
NetJ6_1: J6.1 RL8.2 | length 535.9
  Top Layer w50: J6.1 3080,180 3080,443.46 RL8.2
NetJ6_2: J6.2 RL8.5 | length 494.8
  Top Layer w50: J6.2 2840,502.68 RL8.5
NetJ7_1: J7.1 RL9.2 | length 571.1
  Top Layer w50: J7.1 3600,280 3600,458.46 RL9.2
NetJ7_2: J7.2 RL9.5 | length 530
  Top Layer w50: J7.2 3340,220 3340,497.68 RL9.5
NetJ8_1: J8.1 RL10.2 | length 606.3
  Top Layer w50: J8.1 4100,360 4100,453.46 RL10.2
NetJ8_2: J8.2 RL10.5 | length 565.2
  Top Layer w50: J8.2 3840,300 3840,492.68 RL10.5
NetJ9_1: J9.1 RL11.2 | length 690.5
  Top Layer w50: J9.1 4420,260 4500,260 4600,360 4600,443.46 RL11.2
NetJ9_2: J9.2 RL11.5 | length 637.6
  Top Layer w50: J9.2 4240,280 4300,280 4340,320 4340,482.68 RL11.5
NetJ10_1: J10.1 RL12.2 | length 760.8
  Top Layer w50: J10.1 4860,140 5120,400 5120,458.46 RL12.2
NetJ10_2: J10.2 RL12.5 | length 708
  Top Layer w50: J10.2 4660,280 4780,280 4860,360 4860,497.68 RL12.5
NetJ12_1: J12.1 R23.2 R24.2 U2.9 | length 1543.3
  Top Layer w10: J12.1 6320,318.51 R24.2 R23.2 6478.51,348.51 6590,460 6590,905 6545,950 6545,1125 6520,1150 6520,1320 6495,1345 6450,1345 6435,1330 U2.9
NetJ12_2: J12.2 R14.2 R26.2 | length 263.5
  Top Layer w10: R26.2 R14.2 J12.2
NetJ13_1: J13.1 R35.2 R36.2 U5.9 | length 1483.6
  Top Layer w10: U5.9 5880,1330 5900,1350 5923.9,1350 5985,1288.9 5985,961.57 6065,881.57 6065,496.72 6010,441.72 6010,375 5983.51,348.51 R35.2 R36.2 J13.1
NetJ13_2: J13.2 R33.2 R37.2 | length 263.5
  Top Layer w10: R37.2 R33.2 J13.2
NetL1_1: L1.1 R47.2 | length 80.4
  Top Layer w10: R47.2 L1.1
NetM1_14: M1.14
NetM1_15: M1.15
NetM1_16: M1.16
NetM1_17: M1.17
NetM1_18: M1.18
NetM1_19: M1.19
NetQ1_1: Q1.1 R1.2 | length 72.7
  Bottom Layer w20: R1.2@437.4,525.91 Q1.1
NetQ2_1: Q2.1 R2.2 | length 84
  Bottom Layer w20: R2.2 1207.4,1140.91 Q2.1
NetQ3_1: Q3.1 R3.2 | length 84
  Bottom Layer w20: R3.2 437.4,1140.91 Q3.1
NetQ4_1: Q4.1 R4.2 | length 84
  Bottom Layer w20: R4.2 1972.4,1140.91 Q4.1
NetQ5_1: Q5.1 R5.2 | length 84
  Bottom Layer w20: R5.2 1207.4,525.91 Q5.1
NetQ6_1: Q6.1 R6.2 | length 79
  Bottom Layer w20: R6.2 1972.4,530.91 Q6.1
NetQ7_1: Q7.1 R7.2 | length 69
  Top Layer w20: Q7.1 2674.09,1642.6 R7.2
NetQ8_1: Q8.1 R8.2 | length 67.7
  Top Layer w20: Q8.1 R8.2@3179.09,1642.6
NetQ9_1: Q9.1 R9.2 | length 67.7
  Top Layer w20: Q9.1 R9.2@3684.09,1642.6
NetQ10_1: Q10.1 R10.2 | length 62.7
  Top Layer w20: Q10.1 R10.2@4184.09,1642.6
NetQ11_1: Q11.1 R11.2 | length 62.7
  Top Layer w20: Q11.1 R11.2@4694.09,1642.6
NetQ12_1: Q12.1 R12.2 | length 69
  Top Layer w20: Q12.1 5204.09,1642.6 R12.2
NetR14_1: R14.1 R17.1 U2.14 | length 1004.2
  Top Layer w10: R14.1 6120,480 6094.57,505.43 6094.57,894.57 6145,945 6145,1155 6185,1195 U2.14 6185,1355 R17.1
NetR15_1: R15.1 U1.11 | length 140.5
  Top Layer w10: R15.1 6449,2363 6494,2318 U1.11
NetR16_1: R16.1 R17.2 U2.13 | length 947.9
  Top Layer w10: U2.13 6235,1363.52 R17.2 6258.48,1387 6403,1387 v1(6420,1370) ; R16.1 6514,1768 6528.5,1753.5 6576.5,1753.5 6625,1705 6625,1430 v1(6565,1370)
  Bottom Layer w10: v1(6420,1370) v1(6565,1370)
NetR16_2: R16.2 U1.7 | length 165.8
  Top Layer w10: R16.2 6514,1908 6539,1933 U1.7
NetR18_1: R18.1 R21.1 R23.1 U2.8 | length 1691.4
  Top Layer w10: R18.1 R21.1 6420.43,779.56 6420.43,707.83 6430.43,697.83 6430.43,610.43 6415,595 6360,595 6325,560 6325,480 6340,465 6360,465 R23.1 6480,420 6570,510 6570,896.72 6525,941.72 6525,1115 6485,1155 U2.8
NetR21_2: R21.2 U2.5 | length 270.3
  Top Layer w10: U2.5 6385,975 6456.49,903.51 R21.2
NetR22_1: R22.1 U1.10 | length 134.3
  Top Layer w10: R22.1 6509,2348 6539,2318 U1.10
NetR30_1: R30.1 R31.1 R35.1 U5.8 | length 1716.4
  Top Layer w10: R30.1 R31.1 5905,815 5920,800 5920,698.26 5919.57,697.83 5919.57,619.57 5895,595 5845,595 5814.57,564.57 5814.57,485.43 5835,465 5915,465 5955,425 R35.1 5960,420 6045,505 6045,873.28 5965,953.28 5965,1135 5930,1170 U5.8
NetR31_2: R31.2 U5.5 | length 295.1
  Top Layer w10: U5.5 5830,990 5961.49,858.51 R31.2
NetR33_1: R33.1 R34.1 U5.14 | length 1085.1
  Top Layer w10: R34.1 U5.14 5630,1200 5600,1170 5600,918.28 5555,873.28 5555,505 5590,470 5665,470 5700,435 R33.1
NetR34_2: R34.2 R38.1 U5.13 | length 1477.7
  Top Layer w10: U5.13 5680,1348.52 R34.2 5706.49,1375 v1(5850,1375) ; R38.1 6464,1743 6478.03,1728.97 6559.97,1728.97 6605,1683.94 6605,1455 v1(6565,1415)
  Bottom Layer w10: v1(5850,1375) 5875,1400 6550,1400 v1(6565,1415)
NetR38_2: R38.2 U1.5 | length 165.8
  Top Layer w10: U1.5 6439,1943 6464,1918 R38.2
NetR42_1: R42.1 U6.6 | length 191
  Top Layer w10: U6.6 5995,3309 6045,3359 R42.1
NetR43_1: R43.1 U6.7 | length 199.3
  Top Layer w10: R43.1 5875,3389 5945,3319 U6.7
NP_GND: C15.1 C16.1 F3.2 F6.2 R47.1 U3.3 | length 482
  Top Layer w20: v1(5920,2420) 5940,2400 R47.1
  Bottom Layer w20: v1(5550,2610) 5730,2610 v1(5920,2420)
OUT_12VDC_1: J1.1 RL1.1 | length 679
  Top Layer w60: J1.1 500,210 500,550 584.88,634.88 RL1.1
OUT_12VDC_2: J1.2 RL3.1 | length 1422.1
  Top Layer w60: J1.2 255,255 255,930 579.88,1254.88 RL3.1
OUT_12VDC_3: J2.1 RL5.1 | length 802.4
  Top Layer w60: J2.1 1065,225 1065,400 1299.88,634.88 RL5.1
OUT_12VDC_4: J2.2 RL2.1 | length 1514.2
  Top Layer w60: J2.2 755,165 755,475 1105,825 1105,1040 1319.88,1254.88 RL2.1
OUT_12VDC_5: J3.1 RL4.1 | length 1773.2
  Top Layer w60: J3.1 1200,155 1200,370 1340,510 1570,510 1835,775 1835,1010 2079.88,1254.88 RL4.1
OUT_12VDC_6: J3.2 RL6.1 | length 1052.8
  Top Layer w60: J3.2 1530,285 1725,285 2074.88,634.88 RL6.1
PA0: M1.22
PA1: M1.23
PA2: M1.24
PA3: M1.25
PA4: M1.26
PA5: JP1.3 M1.27 | length 1117.7
  Top Layer w10: M1.27 4846.34,3476.34 JP1.3
PA6: JP1.4 M1.28 | length 1359.2
  Top Layer w10: M1.28 3772.13,3429.84 3837.89,3429.84 3838.05,3430 4900,3430 JP1.4
PA7: JP1.5 M1.29 | length 1359.2
  Top Layer w10: M1.29 4946.34,3376.34 JP1.5
PB4: M1.10
PB5: M1.11
PB6: M1.12
PB7: M1.13
PC0: M1.37 U6.4 | length 2424.7
  Top Layer w10: M1.37 5453.66,2976.34 5510,2920 5642.15,2920 5713.15,2849 5939,2849 6045,2955 U6.4
PC1: M1.36 R40.1 U6.3 | length 2767.9
  Top Layer w10: M1.36 3772.13,3029.84 3837.89,3029.84 3838.05,3030 5428.28,3030 5518.28,2940 5650.43,2940 5721.43,2869 5879,2869 5995,2985 U6.3 5995,3125 5930,3190 R40.1
PC2: M1.35 R39.1 U6.2 | length 2491.7
  Top Layer w10: M1.35 5410.23,3076.34 5526.57,2960 5658.72,2960 5729.72,2889 5839,2889 5945,2995 U6.2 5945,3095 5930,3110 R39.1
PC3: M1.34 R41.1 U6.1 | length 2488.2
  Top Layer w10: M1.34 3772.13,3129.84 3837.89,3129.84 3838.05,3130 5384.85,3130 5534.85,2980 5667,2980 5738,2909 5809,2909 5895,2995 U6.1 5839.12,3056.72 R41.1
PC4: M1.33
PC5: M1.32
PC6: M1.31
PC7: M1.30
PD7: M1.38 R1.1 | length 4897.4
  Top Layer w10: v1(330,525) 330,890 595,1155 790,1155 1035,1400 1035,1888.28 1666.72,2520 2735.15,2520 3091.49,2876.34 M1.38
  Bottom Layer w10: v1(330,525) R1.1
PE3: M1.5
PE4: JP1.6 M1.2 | length 3124.7
  Top Layer w10: M1.2 2519.69,3508.6 2600.28,3428 3271.16,3428 3573,3729.84 3837.89,3729.84 3838.05,3730 5020,3730 JP1.6
PE5: JP1.7 M1.3 | length 3073.9
  Top Layer w10: M1.3 2440.95,3559.05 2592,3408 3373.16,3408 3595,3629.84 4389.84,3629.84 4470,3710 4940,3710 JP1.7
PG0: M1.41 R2.1 | length 3959.9
  Top Layer w10: v1(1080,1140) 1080,1905 1675,2500 2743.43,2500 3068.43,2825 3769.97,2825 M1.41
  Bottom Layer w10: v1(1080,1140) R2.1
PG1: M1.40 R5.1 | length 4046.1
  Top Layer w10: v1(1055,545) 1055,655 1255,855 1255,1040 1350,1135 1530,1135 2220,1825 2220,2161.57 2538.43,2480 2751.72,2480 3048.05,2776.34 M1.40
  Bottom Layer w10: v1(1055,545) 1075,525 R5.1
PG2: M1.39 R3.1 | length 4604
  Top Layer w10: v1(315,1140) 315,1200 495,1380 935,1380 1015,1460 1015,1896.57 1658.43,2540 2726.86,2540 3111.86,2925 3769.97,2925 M1.39
  Bottom Layer w10: v1(315,1140) R3.1
PG5: JP1.8 M1.4 | length 3030.5
  Top Layer w10: M1.4 2362.21,3596.79 2571,3388 3468.16,3388 3610,3529.84 3837.89,3529.84 3838.05,3530 4318.28,3530 4478.28,3690 4860,3690 JP1.8
PH3: M1.6 R26.1 | length 6859.8
  Top Layer w10: M1.6 2204.73,3584.27 2459,3330 3699.21,3330 3699.37,3329.84 5200.16,3329.84 v1(5300,3230) ; R26.1 v1(6065,455)
  Bottom Layer w10: v1(5300,3230) 5298.28,3230 5485,3043.28 5485,650 5645,490 6030,490 v1(6065,455)
PH4: M1.7 R37.1 | length 6559.2
  Top Layer w10: M1.7 2125.99,3526.01 2422.16,3229.84 3837.89,3229.84 3838.05,3230 5250,3230 v1(5290,3190) ; v1(5600,435) 5630,435 R37.1
  Bottom Layer w10: v1(5290,3190) 5465,3015 5465,570 v1(5600,435)
PH5: M1.8
PH6: M1.9
PL0: M1.49 R10.1 | length 813.1
  Top Layer w10: R10.1 v1(4185,1745)
  Bottom Layer w10: M1.49 3890,2304.97 3890,2090 4185,1795 v1(4185,1745)
PL1: M1.48 R9.1 | length 704.4
  Top Layer w10: R9.1 v1(3690,1750)
  Bottom Layer w10: v1(3690,1750) 3690,1788.43 3702.64,1801.07 3702.64,1915.65 3665,1953.28 3665,2322.71 M1.48
PL2: M1.47 R11.1 | length 1380.2
  Top Layer w10: R11.1 v1(4695,1750)
  Bottom Layer w10: M1.47 3910,2384.97 3910,2098.28 4173.28,1835 4610,1835 v1(4695,1750)
PL3: M1.46 R8.1 | length 1275.3
  Top Layer w10: R8.1 v1(3180,1750)
  Bottom Layer w10: v1(3180,1750) 3623.28,1750 3682.64,1809.35 3682.64,1907.36 3645,1945 3645,2402.71 M1.46
PL4: M1.45 R12.1 | length 1973.6
  Top Layer w10: R12.1 v1(5205,1750)
  Bottom Layer w10: M1.45 3930,2464.97 3930,2106.57 4181.57,1855 5100,1855 v1(5205,1750)
PL5: M1.44 R7.1 | length 1843.2
  Top Layer w10: R7.1 v1(2725,1715)
  Bottom Layer w10: v1(2725,1715) 2790,1780 3625,1780 3662.64,1817.64 3662.64,1898.19 3625,1935.83 3625,2482.71 M1.44
PL6: M1.43 R4.1 | length 3067.5
  Top Layer w10: v1(1850,1135) 1850,1400 2240,1790 2240,2153.28 2546.72,2460 2760,2460 3025,2725 3769.97,2725 M1.43
  Bottom Layer w10: v1(1850,1135) 1855,1140 R4.1
PL7: M1.42 R6.1 | length 3715.8
  Top Layer w10: v1(1845,530) 1845,645 2030,830 2030,1105 2075,1150 2295,1150 2350,1205 2350,1710 2270,1790 2270,2155 2555,2440 2768.28,2440 3004.62,2676.34 M1.42
  Bottom Layer w10: v1(1845,530) R6.1
R_GND: F1.2 F2.2 F9.2 J3.3 Q1.2 Q2.2 Q3.2 Q4.2 Q5.2 Q6.2 Q7.2 Q8.2 Q9.2 Q10.2 Q11.2 Q12.2
  other v1: 280,75 480,75 680,75 880,75 1080,75 1280,75 1480,75 1680,75 1780,75 1880,75 1980,75 2080,75 2180,75 1730,175 1830,175 1930,175 2030,175 2130,175 2230,175 80,275 180,275 380,275 580,275 680,275 880,275 980,275 1280,275 1380,275 1880,275 1980,275 2080,275 2180,275 130,575 1730,575 80,675 180,675 780,675 1580,675 130,775 730,775 830,775 930,775 1530,775 1630,775 1730,775 2230,775 380,875 780,875 1180,875 1580,875 1980,875 2280,875 2630,975 930,1175 1030,1175 1430,1175 1630,1175 1730,1175 2430,1175 5330,1175 280,1275 980,1275 1580,1275 1780,1275 2480,1275 2580,1275 330,1375 1430,1375 1530,1375 1630,1375 2830,1375 3330,1375 3830,1375 4330,1375 4630,1375 5130,1375 780,1475 1180,1475 1580,1475 1780,1475 2580,1475 2880,1475 3080,1475 3380,1475 3580,1475 3880,1475 4080,1475 4380,1475 4880,1475 2835,1520 2835,1570 130,1575 230,1575 530,1575 730,1575 830,1575 930,1575 1130,1575 1230,1575 1530,1575 1630,1575 1730,1575 1830,1575 2930,1575 3330,1575 3430,1575 3830,1575 3930,1575 4330,1575 4430,1575 4630,1575 4830,1575 4930,1575 5130,1575 5330,1575 2835,1625 80,1675 180,1675 280,1675 480,1675 580,1675 680,1675 780,1675 880,1675 1180,1675 1280,1675 1380,1675 1480,1675 1580,1675 1680,1675 1780,1675 1880,1675 1980,1675 2780,1675 2835,1675 2880,1675 3280,1675 3380,1675 3780,1675 3880,1675 4280,1675 4380,1675 4780,1675 4880,1675 5280,1675
RS485_GND: C25.1 C27.1 F4.2 J14.3 R39.2 R44.2 U6.5
  other v1: 6080,2875 6180,2875 5730,2975 5830,2975 6130,2975 6230,2975 5720,3075 6080,3075 6180,3075 6030,3175 6130,3175 6230,3175 6180,3275 5930,3375 6130,3375 6230,3375 5730,3575 5830,3575 5930,3575 6130,3575 6230,3575 5680,3675 5780,3675 5880,3675 6080,3675 6180,3675 5830,3775 6230,3775
RX0: M1.0
SCK: M1.52
SCL: M1.21 M2.2 M2.8 | length 2966.7
  Top Layer w10: M2.8 5247.83,2467.78 M2.2
  Bottom Layer w10: M1.21 3425.2,2954.8 3650.16,2729.84 3864.16,2729.84 4012,2582 4012,2540.62 M2.8
SDA: M1.20 M2.3 M2.9 | length 3105.1
  Top Layer w10: M2.9 5247.83,2367.78 M2.3
  Bottom Layer w10: M1.20 3346.46,2903.54 3625,2625 3849,2625 3978,2496 3978,2474.62 M2.9
SS: M1.53
TX0: M1.1
~220_P1: J11.1 RL7.3 RL8.3 RL9.3 RL10.3 RL11.3 RL12.3
~220_P2: J11.2 RL7.6 RL8.6 RL9.6 RL10.6 RL11.6 RL12.6
pads on no net: M1. M1.NC M1.RST M1.SCL M1.SDA M1.VIN M2.1 M2.6 M2.7 M2.12 RL1.2 RL2.2 RL3.2 RL4.2 RL5.2 RL6.2 RL7.1 RL7.4 RL8.1 RL8.4 RL9.1 RL9.4 RL10.1 RL10.4 RL11.1 RL11.4 RL12.1 RL12.4 U1.1 U1.2 U1.3 U1.4 U1.6 U1.13 U1.14 U1.15 U3.1 U3.6

## Polygon pours and split planes (outlines as drawn)
R_GND on Top Layer "RGND" (solid, remove dead copper, pour order 0): 0,1755.01 5430,1755 5430,1065 5315,1065 4900,1065 2785,1065 2605,885 2315,885 2250,820 2250,-5 10,-5 0,5
AGND on Top Layer "AGND_TOP" (solid, remove dead copper, pour order 4): 5489,325 6670,325 6670,2514 6214,2514 6214,2380 6130,2380 6130,1810 5489,1810
RS485_GND on Top Layer "RS485_GND_TOP" (solid, remove dead copper, pour order 8): 5615,3850 6325,3850 6325,2800 5615,2800
DGND on Top Layer "DGND_TOP" (solid, remove dead copper, pour order 10): 1935,1950 1935,1830 5500,1830 5500,1995 5500,2035 5500,2800 5590,2800 5590,2900 5330,2900 5330,2205 3945,2205 3945,2130 1935,2130
AGND on Bottom Layer "AGND_BOT" (solid, remove dead copper, pour order 16): 5489,325 6670,325 6670,2514 6214,2514 6214,2380 6130,2380 6130,1810 5489,1810
R_GND on Bottom Layer "RGND" (solid, remove dead copper, pour order 2): 0,1755 5430,1755 5430,1065 5315,1065 4900,1065 2785,1065 2605,885 2315,885 2250,820 2250,-5 10,-5 0,5
RS485_GND on Bottom Layer "RS485_GND_BOT" (solid, remove dead copper, pour order 12): 5615,3850 6325,3850 6325,2800 5615,2800
DGND on Bottom Layer "DGND_BOT" (solid, remove dead copper, pour order 14): 1935,1950 1935,1830 5450,1830 5450,2900 4850,2900 4850,3580 4660,3580 4660,2800 5330,2800 5330,2205 3945,2205 3945,2130 1935,2130

## Keep-outs
Keep-Out Layer:
  the board outline again, w7

## Other copper
Top Layer:
  region net 12VDC: 5170,1400 5170,1195 5205,1160 5260,1160 5310,1210 5310,1440 5295,1455 5225,1455
  region net 12VDC: 4665,1400 4665,1195 4700,1160 4785,1160 4805,1180 4805,1440 4790,1455 4720,1455
  region net 12VDC: 4155,1400 4155,1195 4190,1160 4275,1160 4295,1180 4295,1440 4280,1455 4210,1455
  region net 12VDC: 3650,1400 3650,1195 3685,1160 3770,1160 3790,1180 3790,1440 3775,1455 3705,1455
  region net 12VDC: 3145,1400 3145,1195 3180,1160 3265,1160 3285,1180 3285,1440 3270,1455 3200,1455
  region net 12VDC: 2640,1400 2640,1195 2675,1160 2760,1160 2780,1180 2780,1440 2765,1455 2695,1455
  region net 12VDC: 2125,960 2100,985 2100,1050 2135,1085 2455,1085 2640,1270 5280,1270 5305,1245 5305,1205 5260,1160 2760,1160 2560,960
  region net 12VDC: 5170,1580 5230,1580 5230,1520 5310,1440 5310,1360 5290,1340 5230,1340 5170,1400
  region net 12VDC: 4665,1580 4725,1580 4725,1520 4805,1440 4805,1360 4785,1340 4725,1340 4665,1400
  region net 12VDC: 4155,1580 4215,1580 4215,1520 4295,1440 4295,1360 4275,1340 4215,1340 4155,1400
  region net 12VDC: 3650,1580 3710,1580 3710,1520 3790,1440 3790,1360 3770,1340 3710,1340 3650,1400
  region net 12VDC: 3145,1580 3205,1580 3205,1520 3285,1440 3285,1360 3265,1340 3205,1340 3145,1400
  region net 12VDC: 2640,1580 2700,1580 2700,1520 2780,1440 2780,1360 2760,1340 2700,1340 2640,1400
  region net NetD12_1: 4990,1695 5055,1695 5055,1410 4990,1345 4925,1345 4905,1365 4905,1425 4990,1510
  region net NetD11_1: 4485,1695 4550,1695 4550,1410 4485,1345 4420,1345 4400,1365 4400,1425 4485,1510
  region net NetD10_1: 3975,1695 4040,1695 4040,1410 3975,1345 3910,1345 3890,1365 3890,1425 3975,1510
  region net NetD9_1: 3470,1695 3535,1695 3535,1410 3470,1345 3405,1345 3385,1365 3385,1425 3470,1510
  region net NetD8_1: 2965,1695 3030,1695 3030,1410 2965,1345 2900,1345 2880,1365 2880,1425 2965,1510
  region net NetD7_1: 2460,1695 2525,1695 2525,1410 2460,1345 2395,1345 2375,1365 2375,1425 2460,1510
  region net NetC14_2: 5775,2040 5810,2040 5853,2083 5853,2225 5890,2225 5890,2000 5775,2000
  region net NetC14_1: 5753,2220 5758,2225 5774,2225 5777,2222 5777,2116 5705,2044 5705,1999 5592,1999 5592,2062 5643,2113 5731,2113 5753,2135
  region net 5VDC: 5765,3465 5815,3465 5815,3375 5890,3300 5910,3300 5910,3240 5765,3240
  region net +VS: 6254,2198 6254,2338 6274,2358 6364,2358 6364,2413 6194,2413 6130,2349 6130,2198
  region net -5VDC: 5853,2385 5853,2487 5775,2565 5775,2690 5890,2690 5890,2385
  region net NP_GND: 5525,2635 5705,2635 5705,2565 5645,2565 5595,2515 5595,2380 5670,2380 5670,2310 5785,2310 5830,2265 5830,2150 5800,2150 5800,2245 5770,2275 5525,2275
  region net NP_GND: 5800,2150 5800,2120 5715,2035 5715,1910 5705,1900 5705,1840 5760,1840 5760,2045 5830,2115 5830,2150
  region net -VS: 5918,1810 5998,1810 5998,1725 5918,1725
  region net -5VDC: 5853,2385 5853,2307 5918,2242 5918,1834 5998,1834 5998,2229 5890,2337 5890,2385
  region net +VS: 6130,2591 6208,2591 6208,2300 6130,2300
  region net +5VDC: 6031,2593 6110,2593 6110,2426 6032,2426 6031,2427
  region net 5VDC: 6030,2620 6210,2620 6210,2760 6030,2760
  region net 5VDC: 5450,3850 5550,3850 5550,3470 5555,3465 5815,3465 5815,3420 5450,3420
Bottom Layer:
  region net 5VDC: 4660,3600 4660,3850 5570,3850 5570,3740 4850,3740 4850,3600
  region net 12VDC: 80,1000 120,960 180,960 220,920 220,580 80,440 80,360 100,340 220,340 300,420 300,980 200,1080 100,1080 80,1060
  region net 12VDC: 300,2320 320,2340 380,2340 440,2280 440,1540 200,1300 200,980 180,960 100,960 80,980 80,1300 360,1580 360,2120 300,2180
  region net 12VDC: 80,1060 100,1080 2180,1080 2215,1045 2215,995 2180,960 100,960 80,980
  region net 12VDC: 80,440 100,460 2180,460 2215,425 2215,375 2180,340 100,340 80,360
  region net 12VDC: 2060,550 2060,425 2140,345 2185,345 2215,375 2215,425 2130,510 2130,550
  region net 12VDC: 1295,550 1295,425 1375,345 1420,345 1450,375 1450,425 1365,510 1365,550
  region net 12VDC: 2060,1170 2060,1045 2140,965 2185,965 2215,995 2215,1045 2130,1130 2130,1170
  region net 12VDC: 1295,1170 1295,1045 1375,965 1420,965 1450,995 1450,1045 1365,1130 1365,1170
  region net ~220_P1: 2675,345 2780,345 2780,470 3180,470 3180,345 3285,345 3285,470 3680,470 3680,340 3790,340 3790,470 4190,470 4190,340 4295,340 4295,470 4700,470 4700,340 4805,340 4805,470 5150,470 5205,415 5205,70 5365,70 5365,370 5205,530 2710,530 2675,495
  region net ~220_P2: 2370,450 2485,450 2485,305 2880,305 2880,450 2985,450 2985,305 3385,305 3385,450 3490,450 3490,305 3890,305 3890,450 3995,450 3995,305 4400,305 4400,450 4505,450 4505,305 4900,305 4900,450 5035,450 5110,375 5110,210 5110,80 5110,70 5100,70 4900,70 4900,240 2410,240 2370,280
  region net NetD4_2: 1920,1305 1920,1380 2085,1545 2185,1545 2215,1515 2215,1455 2130,1370 2130,1305
  region net NetD6_2: 1920,685 1920,760 2085,925 2185,925 2215,895 2215,835 2130,750 2130,685
  region net NetD2_2: 1155,1305 1155,1380 1320,1545 1420,1545 1450,1515 1450,1455 1365,1370 1365,1305
  region net NetD5_2: 1155,685 1155,760 1320,925 1420,925 1450,895 1450,835 1365,750 1365,685
  region net 12VDC: 525,550 525,425 605,345 650,345 680,375 680,425 595,510 595,550
  region net 12VDC: 525,1170 525,1045 605,965 650,965 680,995 680,1045 595,1130 595,1170
  region net NetD1_1: 385,685 385,760 550,925 650,925 680,895 680,835 595,750 595,685
  region net NetD3_1: 385,1305 385,1380 550,1545 650,1545 680,1515 680,1455 595,1370 595,1305
  region net NetF1_1: 40,2310 70,2340 130,2340 160,2310 160,2205 260,2105 300,2105 330,2075 330,1790 155,1790 155,2040 40,2155
  region net -VS: 5915,1755 5915,1670 5775,1530 5775,1270 6350,1270 6350,1350 5825,1350 5825,1470 5998,1643 5998,1755
  region net +VS: 5770,1085 5770,1030 6545,1030 6660,1145 6660,2435 6610,2485 6130,2485 6130,2435 6593,2435 6620,2408 6620,1170 6535,1085
  region net +5VDC: 5700,2380 6020,2380 6030,2390 6030,2490 6110,2490 6110,2390 6070,2350 5700,2350
  region net 5VDC: 5450,3850 5570,3850 5570,2760 6210,2760 6210,2690 6130,2690 5506,2690 5506,3674 5450,3730